# Altium PCB SAO_Area3001_L_WS2812_00.PcbDoc
Units mm, origin at the board's own origin, x right, y up, seen from the top; angles counter-clockwise.
Board outline 95 x 15.5 mm, 2 copper layers (Top Layer, Bottom Layer), stack 1.571 mm thick; 10 components, 13 nets, 44 pads, 0 vias.
Unrouted connection lines stored in the file: 26.
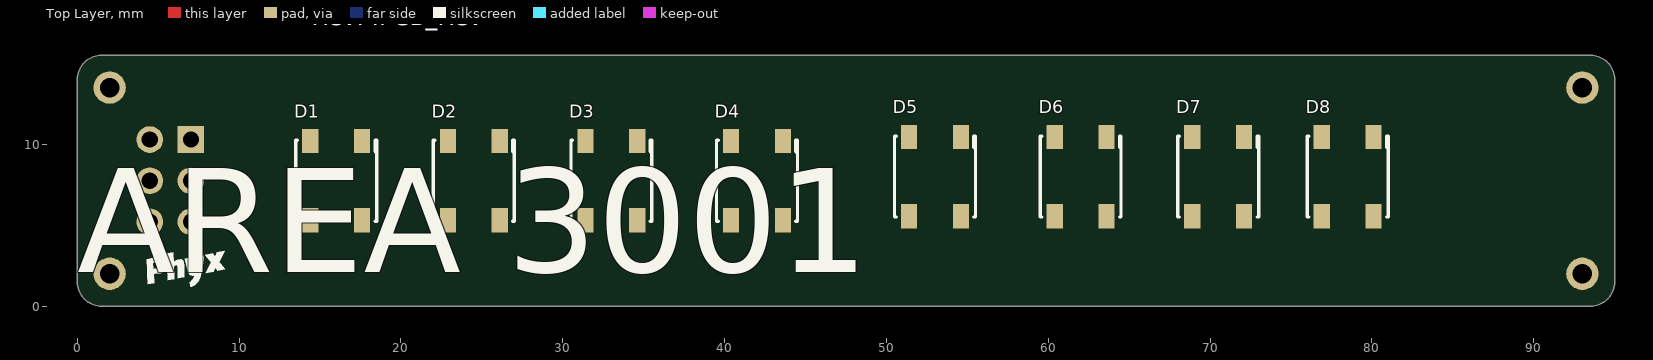
[diagram p0: Top Layer view]
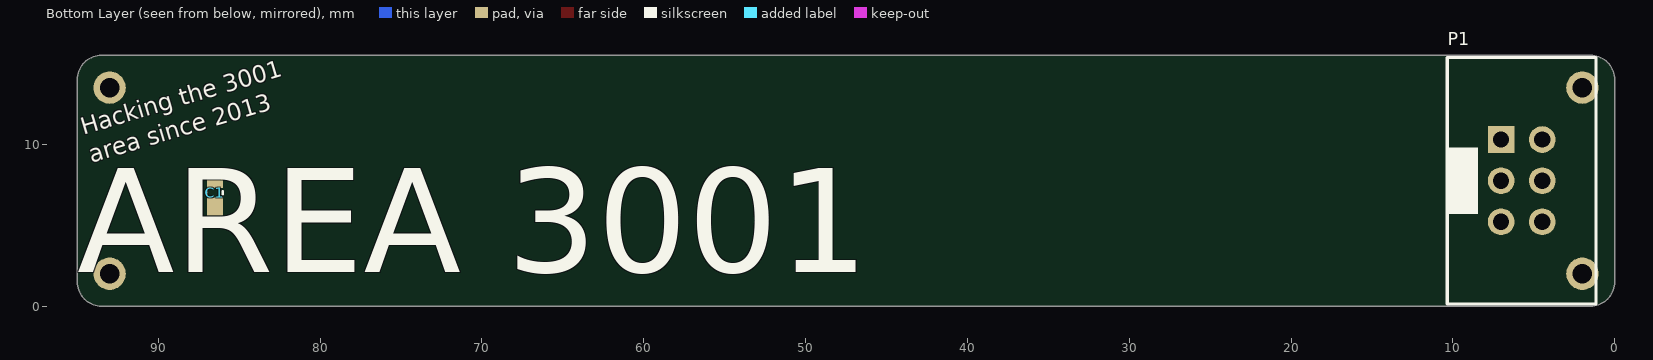
[diagram p1: Bottom Layer view, seen from below]

## Layer stack, top to bottom
Top Solder: solder mask 0.0102, Solder Resist, Dk 3.5
Top Layer: signal copper 0.0356
Dielectric1: core 1.5, FR-4, Dk 4.8
Bottom Layer: signal copper 0.0356
Bottom Solder: solder mask 0.0102, Solder Resist, Dk 3.5

## Board outline
0,1.5 0,14 cw(c1.5,14) 1.5,15.5 93.5,15.5 cw(c93.5,14) 95,14 95,1.5 cw(c93.5,1.5) 93.5,0 1.5,0 cw(c1.5,1.5)

## Design rules (kind name [scope] priority, off if disabled: settings)
BoardOutlineClearance [NOT OnLayer('Top Overlay') AND NOT OnLayer('Bottom Overlay') AND NOT IsText] p1: gap=0.5 ignorepadtopadclearanceinfootprint=FALSE except(0: Arc-SplitContinuation Track-SplitContinuation SMDPad-SplitContinuation THPad-SplitContinuation Via-SplitContinuation Fill-SplitContinuation Poly-SplitContinuation Region-SplitContinuation Text-SplitContinuation)
Clearance [All] p1: gap=0.15 ignorepadtopadclearanceinfootprint=FALSE except(0: Arc-Hole Track-Hole SMDPad-Hole THPad-Hole Via-Hole Fill-Hole Poly-Hole Region-Hole Text-Hole; 0.3: Arc-Poly Track-Poly THPad-Poly Via-Poly Fill-Poly; 1.1: Poly-Poly)
HoleSize [All] p1: absolutevalues=TRUE maxlimit=10 minlimit=0.025 maxpercent=80.000 minpercent=20.000
PolygonConnect PolygonConnect_VIA [IsVia] p1: connectstyle=Direct reliefconductorwidth=0.254 reliefentries=4 polygonreliefangle="90 Angle" airgapwidth=0.254
PolygonConnect [All] p2: connectstyle=Relief reliefconductorwidth=0.254 reliefentries=4 polygonreliefangle="90 Angle" airgapwidth=0.254
RoutingVias [All] p1: holewidth=0.3 width=0.7 viastyle="Through Hole" minholewidth=0.3 minwidth=0.2 maxholewidth=0.6 maxwidth=1.2
SilkToSolderMaskClearance SilkscreenOverComponentPads [IsPad] p1: minsilkscreentomaskgap=0.254 clearancetoexposedcopper=TRUE
SolderMaskExpansion [All] p1: expansion=0.05
Width [All] p1: maxlimit=5 minlimit=0.15 preferedwidth=0.25
28 further rules are at their usual default settings.

## Components (designator, comment, footprint, x,y, rotation, side; value= is the part's Value field where it differs from the comment)
C1 "CAP_CERAMIC" C0603_N 86.5,7 r90 bottom value="1uF 16V"
D1 "WS2812 based digital RGB LED 5050 White package" LED_5050_WS2812B_WHITE 16,7.75 r90 top value="WS218B 5050 WH"
D2 "WS2812 based digital RGB LED 5050 White package" LED_5050_WS2812B_WHITE 24.5,7.75 r90 top value="WS218B 5050 WH"
D3 "WS2812 based digital RGB LED 5050 White package" LED_5050_WS2812B_WHITE 33,7.75 r90 top value="WS218B 5050 WH"
D4 "WS2812 based digital RGB LED 5050 White package" LED_5050_WS2812B_WHITE 42,7.75 r90 top value="WS218B 5050 WH"
D5 "WS2812 based digital RGB LED 5050 White package" LED_5050_WS2812B_WHITE 53,8 r90 top value="WS218B 5050 WH"
D6 "WS2812 based digital RGB LED 5050 White package" LED_5050_WS2812B_WHITE 62,8 r90 top value="WS218B 5050 WH"
D7 "WS2812 based digital RGB LED 5050 White package" LED_5050_WS2812B_WHITE 70.5,8 r90 top value="WS218B 5050 WH"
D8 "WS2812 based digital RGB LED 5050 White package" LED_5050_WS2812B_WHITE 78.5,8 r90 top value="WS218B 5050 WH"
P1 "Boxed Header 3X2" B_HDR2X3 5.75,7.75 r270 bottom

## Footprints (in the part's own frame and the unit in brackets; to place one, negate y for a bottom-side part, rotate by r counter-clockwise, add the part's x,y. Pads: shape width x height; smd on the part's side, far side on the other; paste and mask are expansions set on the pad)
B_HDR2X3 [mm] "Boxed Header 2x3 pins"
  rect 1.65x1.65 hole 1: 1(-2.54,-1.27)
  round 1.65 hole 1: 2(-2.54,1.27) 3(0,-1.27) 4(0,1.27) 5(2.54,-1.27) 6(2.54,1.27)
  silkscreen extent -7.62,-4.6 7.62,4.6, body extent -7.43,-4.6 7.4,4.67, height 9.39
C0603_N [mm] "Low density"
  rect 1.1x1 smd: 1(-0.85,0) 2(0.85,0)
  silkscreen extent -0.1,-0.5 0.1,0.5, body extent -0.8,-0.4 0.8,0.4, height 0.3
LED_5050_WS2812B_WHITE [mm] "5050 RGB LED WS2812B WHITE"
  rect 1.5x1 smd: 1(-2.45,1.6) 2(-2.45,-1.6) 3(2.45,-1.6) 4(2.45,1.6)
  silkscreen extent -2.5,-2.5 2.5,2.5, body extent -2.7,-2.5 2.7,2.5, height 1.6

## Part data
C1: library part "CAP # 1uF 16V 0603", "Capacitor Ceramic", Supplier Part Number 1=2320814, Supplier 1=Farnell
D1 D2 D3 D4 D5 D6 D7 D8: library part "LED # RGB WS2812B-5050 WH", "=Description", Supplier Part Number 1="WS2812B White 5050", Supplier 1=Aliexpress
P1: library part "Pin Header 2.54mm dual row 6way Boxed"

## Free pads (board coordinates)
  round 2 hole 1.2: 0(2,2) 0(2,13.5) 0(93,2) 0(93,13.5)

## Nets (pads, with @x,y where several pads share a name; then routed paths per layer and width w, separated by ;. In a path a pad name is that pad's centre, name@x,y a point inside that pad or via, vN(x,y) a via of type N, cw(c..) or ccw(c..) an arc to the next point about the centre after c; other vN are vias at no path point)
GND: C1.2 D1.3 D2.3 D3.3 D4.3 D5.3 D6.3 D7.3 D8.3 P1.2
I2C.SCL: P1.4
I2C.SDA: P1.3
LED.CLK: P1.6
LED.DATA: D1.4 P1.5
NetD1_2: D1.2 D2.4
NetD2_2: D2.2 D3.4
NetD3_2: D3.2 D4.4
NetD4_2: D4.2 D5.4
NetD5_2: D5.2 D6.4
NetD6_2: D6.2 D7.4
NetD7_2: D7.2 D8.4
VCC: C1.1 D1.1 D2.1 D3.1 D4.1 D5.1 D6.1 D7.1 D8.1 P1.1
pads on no net: D8.2

## Keep-outs
Keep-Out Layer:
  text ".Layer_Name" at 264.902,-46.311 h3.5

## Other copper
Top Layer:
  text ".Layer_Name" at 264.902,-46.311 h3.5
Bottom Layer:
  text ".Layer_Name" at 264.902,-46.311 h3.5

## Silkscreen, mask and mechanical layers (free items; w line width, h text height)
Top Overlay:
  drawing of 4 lines, arcs and shapes, not listed
  text ".PCB_Title" at 11.125,18.875 h1.8
  text "Rev. .PCB_Rev" at 14.5,17 h1.8
  text "AREA 3001" at 0,0 h11
  text ".Layer_Name" at 264.902,-46.311 h3.5
Bottom Overlay:
  text "AREA 3001" at 27.5,25.5 h1.5 r10
  text "Hacking the 3001 / area since 2013" at 94,8.5 h1.8 r343.5
  text "AREA 3001" at 95,0 h11
  text ".Layer_Name" at 264.902,-46.311 h3.5
Top Paste:
  text ".Layer_Name" at 264.902,-46.311 h3.5
Bottom Paste:
  text ".Layer_Name" at 264.902,-46.311 h3.5
Top Solder:
  region: 6.475,21.5
  text ".Layer_Name" at 264.902,-46.311 h3.5
Bottom Solder:
  text ".Layer_Name" at 264.902,-46.311 h3.5
Drill Guide:
  text ".Layer_Name" at 264.902,-46.311 h3.5
3D Symbols:
  text ".Layer_Name" at 264.902,-46.311 h3.5
Outline:
  the board outline again, w0.1
Comments:
  text ".Layer_Name" at 264.902,-46.311 h3.5
Fabrication:
  text "Black Solder Mask" at -16,-7 h1.5
  text "White Silkscreen" at -16,-10 h1.5
  text "1mm Thickness" at -16,-13 h1.5
  text ".Layer_Name" at 264.902,-46.311 h3.5
Placebound Top:
  text ".Layer_Name" at 264.902,-46.311 h3.5
Placebound Bottom:
  text ".Layer_Name" at 264.902,-46.311 h3.5
Frame:
  drawing of 15 lines, arcs and shapes, not listed
  text "Document" at 260.402,-31.311 h2
  text ".PCB_TITLE" at 261.902,-36.811 h3
  text "Layer Name" at 260.402,-41.311 h2
  text "Date" at 260.402,-51.311 h2
  text "Rev" at 300.402,-51.311 h2
  text ".Print_Date" at 263.402,-56.811 h3.5
  text ".PCB_REV" at 304.902,-56.811 h4
  text "Desginer" at 210.402,-61.311 h2
  text "Document" at 260.402,-61.311 h2
  text ".Pcb_File_Name_No_Path" at 261.902,-66.311 h1.5
  text ".PCB_ENGINEER" at 214.902,-66.811 h4
Assembly Top:
  text ".Layer_Name" at 264.902,-46.311 h3.5
Assembly Bottom:
  text ".Layer_Name" at 264.902,-46.311 h3.5
Drill Drawing:
  lines w0.15: 117.276,4.4 287.356,4.4 ; 117.276,8.4 287.356,8.4 ; 124.674,2.4 124.674,10.4 ; 131.773,2.4 131.773,10.4 ; 146.602,2.4 146.602,10.4 ; 153.4,2.4 153.4,10.4 ; 163.237,2.4 163.237,10.4 ; 183.265,2.4 183.265,10.4 ; 191.183,2.4 191.183,10.4 ; 201.18,2.4 201.18,10.4 ; 209.898,2.4 209.898,10.4 ; 221.335,2.4 221.335,10.4 ; 239.169,2.4 239.169,10.4 ; 257.004,2.4 257.004,10.4 ; 268.601,2.4 268.601,10.4 ; 117.276,2.4 287.356,2.4 287.356,10.4 117.276,10.4 117.276,2.4 ; 118.079,5.222 118.301,5.222 118.523,5 118.745,5.222 118.967,5.222 118.745,5.444 118.967,5.667 118.745,5.667 118.523,5.889 118.301,5.667 118.079,5.667 118.301,5.444 118.079,5.222 ; 118.079,7 118.967,7 118.967,7.889 118.079,7.889 118.079,7
  text "Symbol" at 118.476,9 h0.96
  text "Count" at 125.274,9 h0.96
  text "Hole Size" at 132.373,9 h0.96
  text "Plated" at 147.202,9 h0.96
  text "Hole Type" at 154,9 h0.96
  text "Drill Layer Pair" at 163.837,9 h0.96
  text "Via/Pad" at 183.865,9 h0.96
  text "Pad Shape" at 191.783,9 h0.96
  text "Template" at 201.78,9 h0.96
  text "Description" at 210.498,9 h0.96
  text "Hole Tolerance (+)" at 221.935,9 h0.96
  text "Hole Tolerance (-)" at 239.769,9 h0.96
  text "Hole Length" at 257.604,9 h0.96
  text "Routed Path Length" at 269.201,9 h0.96
  text "4" at 125.274,7 h0.8
  text "1,200mm (47,24mil)" at 132.373,7 h0.8
  text "PTH" at 147.202,7 h0.8
  text "Round" at 154,7 h0.8
  text "Top Layer - Bottom Layer" at 163.837,7 h0.8
  text "Pad" at 183.865,7 h0.8
  text "Rounded" at 191.783,7 h0.8
  text "c200h120" at 201.78,7 h0.8
  text "-" at 257.604,7 h0.8
  text "-" at 269.201,7 h0.8
  text "6" at 125.274,5 h0.8
  text "1,000mm (39,37mil)" at 132.373,5 h0.8
  text "PTH" at 147.202,5 h0.8
  text "Round" at 154,5 h0.8
  text "Top Layer - Bottom Layer" at 163.837,5 h0.8
  text "Pad" at 183.865,5 h0.8
  text "(Mixed)" at 191.783,5 h0.8
  text "(Mixed)" at 201.78,5 h0.8
  text "-" at 257.604,5 h0.8
  text "-" at 269.201,5 h0.8
  text "10 Total" at 125.274,3 h0.8
  text ".Layer_Name" at 264.902,-46.311 h3.5

## Dimensions
0,14 to 95,14 on Fabrication
1.5,15.5 to 1.5,0 on Fabrication